# EAGLE board camera-parts (EAGLE 7.7.0)

Size 63 x 44 mm. Coordinates in mm from the lower left corner, seen from the top.
Outline: 3,44 24,44 arc-90 27,41 27,9 arc-90 24,6 3,6 arc-90 0,9 0,41 arc-90 3,44
Outline: 39,44 60,44 arc-90 63,41 63,3 arc-90 60,0 39,0 arc-90 36,3 36,41 arc-90 39,44
Outline: 47.5,40.5 47.5,35.5 arc90 48.5,34.5 50.5,34.5 arc90 51.5,35.5 51.5,40.5 arc90 50.5,41.5 48.5,41.5 arc90 47.5,40.5
Copper layers (1*16): Top 0.035mm / dielectric 1.5mm / Bottom 0.035mm
Design rules "default": minimum track width 10mil, minimum drill 24mil, track to track 8mil, track to pad 8mil, pad to pad 8mil, via to via 8mil, smd to smd 8mil, copper to edge 40mil, drill to drill 8mil, minimum pad ring 10mil, minimum via ring 8mil, stop-mask expansion 4mil, vias tented up to drill 0mil, thermal gap 10mil
Holes 6.1 mm at 13.5,38

## Footprints (pad centres in the part's own frame; a part is rotated, then mirrored left to right if it is on the bottom)
CAMERA-MODULE = hole 2.2: 2,22; 23,22; 2,7.5; 23,7.5
SERVO-HOLES = hole 2.2: -4.5,-4.5; 4.5,-4.5; 4.5,4.5; -4.5,4.5 | hole 3.2: 0,0

## Placement (x,y rotation side)
U$1  CAMERA-MODULE  [CAMERA-MODULE]  1,9 0 top
U$4  CAMERA-MODULE  [CAMERA-MODULE]  37,9 0 top
U$5  SERVO-HOLES  [SERVO-HOLES]  49.5,7 0 top

## Library data of the parts
U$1 U$4 = 0_Rpi3_RevA
U$5 = 0-chirimen